# Altium PCB bgm111-breakout.PcbDoc
Units mm, origin at the board's own origin, x right, y up, seen from the top; angles counter-clockwise.
Board outline 31 x 33.75 mm, 2 copper layers (Top Layer, Bottom Layer); 16 components, 30 nets, 94 pads, 10 vias.
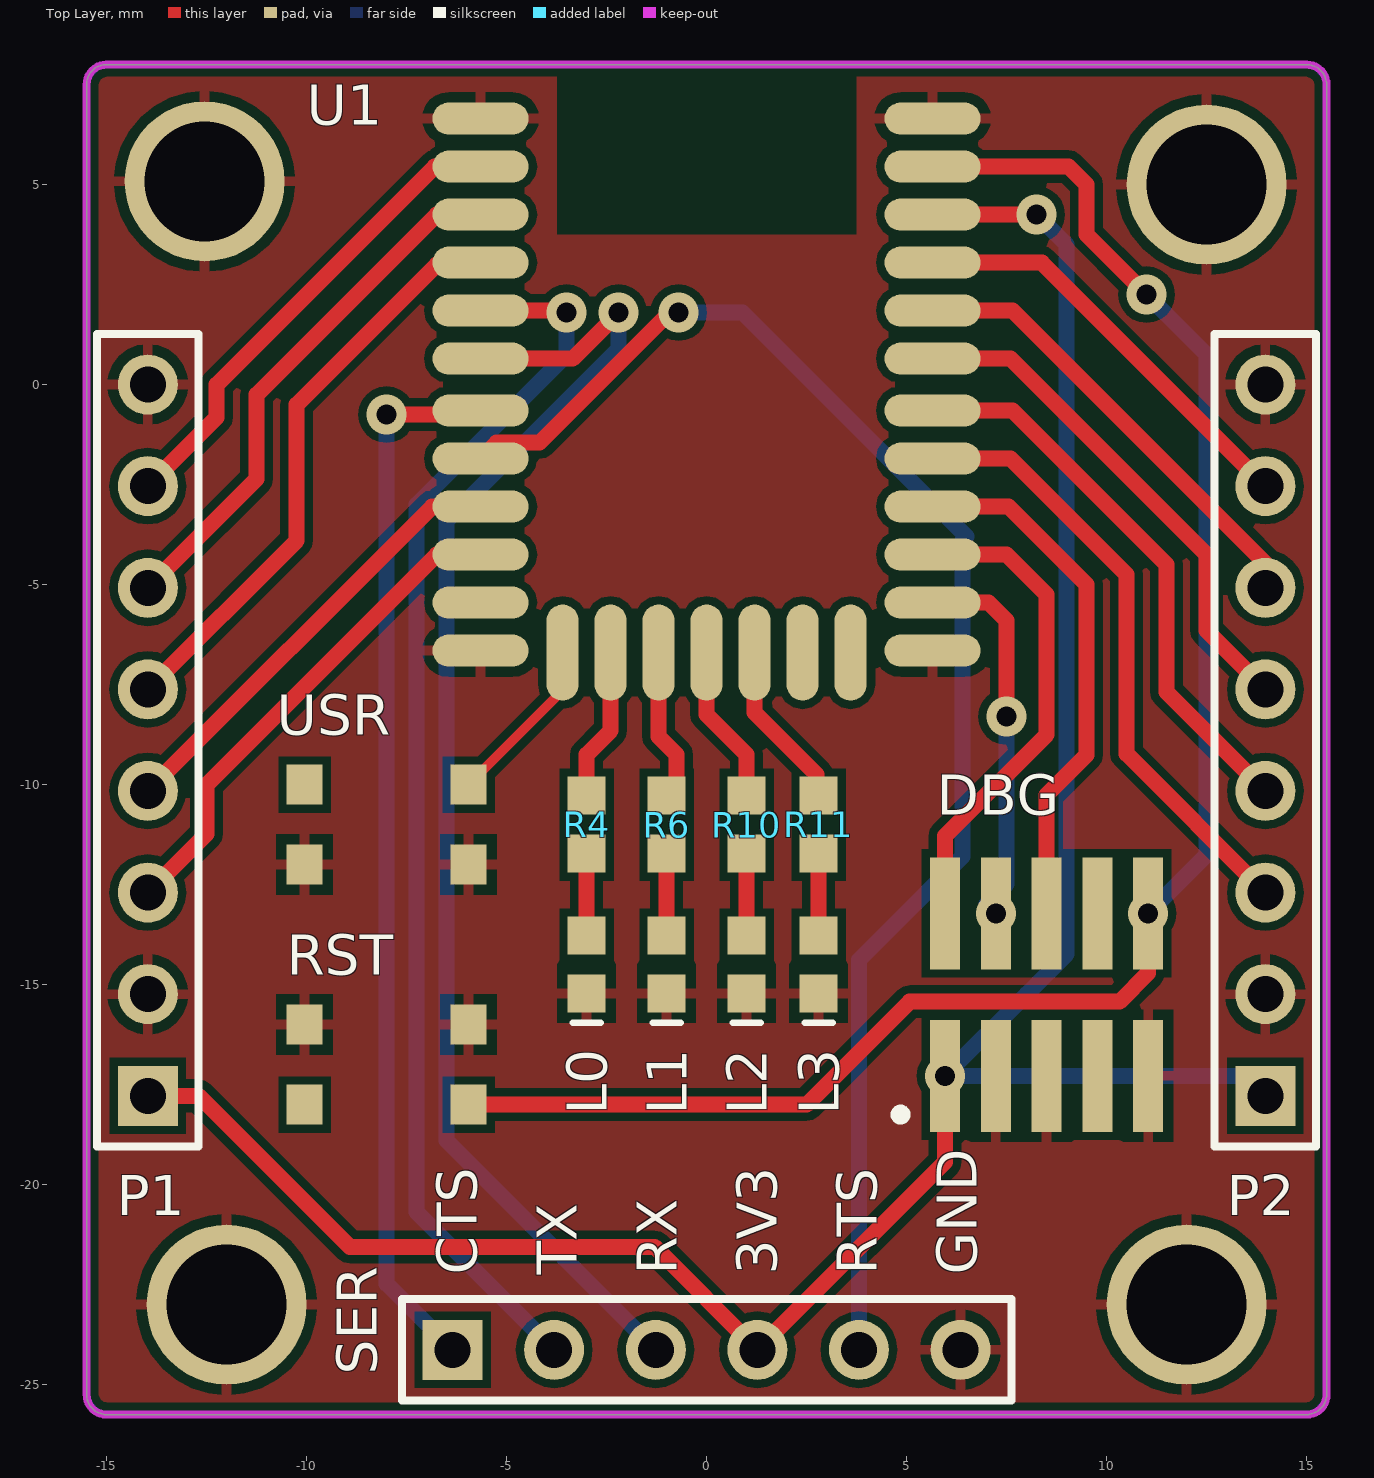
[diagram p0: Top Layer view]
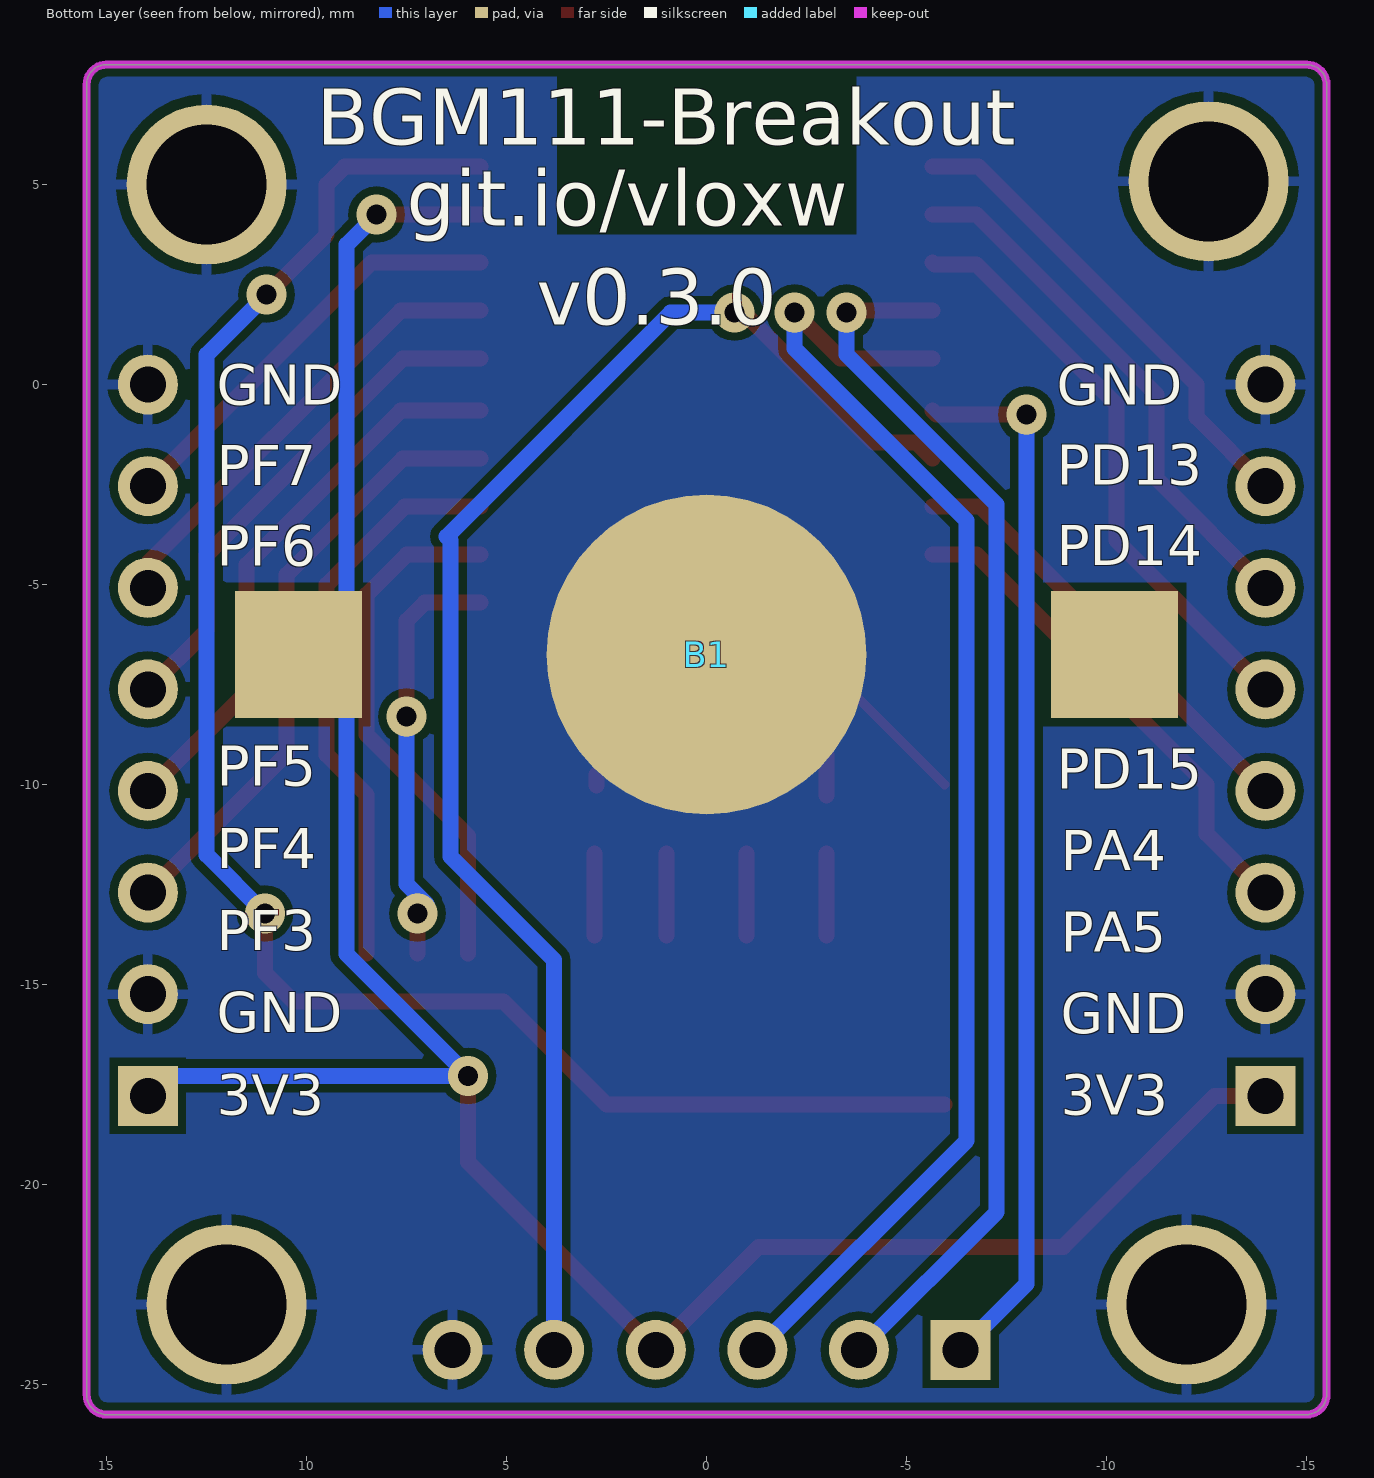
[diagram p1: Bottom Layer view, seen from below]

## Layer stack, top to bottom
Top Solder: solder mask 0.0102, Solder Resist, Dk 3.5
Top Layer: signal copper 0.0356
Dielectric 1: dielectric 0.32, FR-4, Dk 4.8
Bottom Layer: signal copper 0.0356
Bottom Solder: solder mask 0.0102, Solder Resist, Dk 3.5

## Board outline
-15,-25.75 cw(c-15,-25.25) -15.5,-25.25 -15.5,7.5 cw(c-15,7.5) -15,8 15,8 cw(c15,7.5) 15.5,7.5 15.5,-25.25 cw(c15,-25.25) 15,-25.75

## Design rules (kind name [scope] priority, off if disabled: settings)
Clearance [All] p1: gap=0.2
HoleSize [All] p1: absolutevalues=TRUE maxlimit=5 minlimit=0.025 maxpercent=80.000 minpercent=20.000
MinimumAnnularRing [All] p1: minimumring=0.203
PolygonConnect [InNet('GND') vs IsVia] p1: connectstyle=Direct reliefconductorwidth=0.254 reliefentries=4 polygonreliefangle="90 Angle" airgapwidth=0.254
PolygonConnect PolygonConnect_2 [InNet('GND') vs HasFootprint('3012')] p2: connectstyle=Direct reliefconductorwidth=0.254 reliefentries=4 polygonreliefangle="90 Angle" airgapwidth=0.254
PolygonConnect PolygonConnect_1 [All] p3: connectstyle=Relief reliefconductorwidth=0.254 reliefentries=4 polygonreliefangle="90 Angle" airgapwidth=0.254
RoutingVias [All] p1: holewidth=0.711 width=1.27 viastyle="Through Hole" minholewidth=0.5 minwidth=1 maxholewidth=0.711 maxwidth=3
SilkToSilkClearance [All] p1: silktosilkclearance=0.2
SolderMaskExpansion [All] p1: expansion=0.102
Width [All] p1: maxlimit=2 minlimit=0.2 preferedwidth=0.254
28 further rules are at their usual default settings.

## Components (designator, comment, footprint, x,y, rotation, side; value= is the part's Value field where it differs from the comment)
B1 "BATT-SINGLE-CELL" 3012 0,-6.75 r180 bottom
DBG "FTSH-105" FTSH-105-XX-X-DV-K 8.5,-15.25 r180 top
L0 "RED" SMT0603P -3,-14.5 r270 top
L1 "RED" SMT0603P -1,-14.5 r270 top
L2 "RED" SMT0603P 1,-14.5 r270 top
L3 "RED" SMT0603P 2.8,-14.5 r270 top
P1 "Header 8" HDR1X8 -13.97,-17.78 r90 top
P2 "Header 8" HDR1X8 13.97,-17.78 r90 top
R4 "Resistor" SMT0603 -3,-11 r90 top
R6 "Resistor" SMT0603 -1,-11 r90 top
R10 "Resistor" SMT0603 1,-11 r90 top
R11 "Resistor" SMT0603 2.8,-11 r90 top
RST "KMR231NG" KMR231NG -8,-17 r0 top
SER "Header 6" HDR1X6 -6.35,-24.13 r0 top
U1 "BGM111" BGM111 0,0 r0 top
USR "KMR231NG" KMR231NG -8,-11 r0 top

## Footprints (in the part's own frame and the unit in brackets; to place one, negate y for a bottom-side part, rotate by r counter-clockwise, add the part's x,y. Pads: shape width x height; smd on the part's side, far side on the other; paste and mask are expansions set on the pad)
3012 [mm] "COIN CELL HOLDER 16MM"
  round 8 smd mask+2: 0(0,0)
  rect 3.18x3.18 smd: 1(-10.2,0) 1(10.2,0)
  body extent -11.61,-8.74 11.61,6.35, height 4.05
BGM111 [mm] "BLUEGIGA BLE4.2 MODULE"
  rrect100% 2.4x0.8 smd: 1(-5.65,6.65) 2(-5.65,5.45) 3(-5.65,4.25) 4(-5.65,3.05) 5(-5.65,1.85) 6(-5.65,0.65) 7(-5.65,-0.65) 8(-5.65,-1.85) 9(-5.65,-3.05) 10(-5.65,-4.25) 11(-5.65,-5.45) 12(-5.65,-6.65) 20(5.65,-6.65) 21(5.65,-5.45) 22(5.65,-4.25) 23(5.65,-3.05) 24(5.65,-1.85) 25(5.65,-0.65) 26(5.65,0.65) 27(5.65,1.85) 28(5.65,3.05) 29(5.65,4.25) 30(5.65,5.45) 31(5.65,6.65)
  rrect100% 0.8x2.4 smd: 13(-3.6,-6.7) 14(-2.4,-6.7) 15(-1.2,-6.7) 16(0,-6.7) 17(1.2,-6.7) 18(2.4,-6.7) 19(3.6,-6.7)
  Mechanical 13 keep-out region: -3.8,4 3.8,4 3.8,7.5 -3.8,7.5
  body extent -6.45,-7.5 6.45,7.5, height 2.2
FTSH-105-XX-X-DV-K [mm] "1.27mm pitch, 10 pin, terminal strip; vertical, SMT"
  rect 0.75x2.8 smd mask+0: 1(2.54,2.03) 2(2.54,-2.03) 3(1.27,2.03) 4(1.27,-2.03) 5(0,2.03) 6(0,-2.03) 7(-1.27,2.03) 8(-1.27,-2.03) 9(-2.54,2.03) 10(-2.54,-2.03)
  silkscreen extent 3.53,2.88 3.77,3.12, body extent -3.14,-2.92 3.14,2.92, height 6.1
HDR1X6 [mm] "Connector; Header; 6 Position"
  rect 1.5x1.5 hole 0.9: 1(0,0)
  round 1.5 hole 0.9: 2(2.54,0) 3(5.08,0) 4(7.62,0) 5(10.16,0) 6(12.7,0)
  silkscreen extent -1.27,-1.27 13.97,1.27
HDR1X8 [mm] "Connector; Header; 8 Position"
  rect 1.5x1.5 hole 0.9: 1(0,0)
  round 1.5 hole 0.9: 2(2.54,0) 3(5.08,0) 4(7.62,0) 5(10.16,0) 6(12.7,0) 7(15.24,0) 8(17.78,0)
  silkscreen extent -1.27,-1.27 19.05,1.27
KMR231NG [mm] "PB SW SM TOP"
  rect 0.9x1 smd: 1(-2.05,-1) 2(2.05,-1) 3(-2.05,1) 4(2.05,1)
SMT0603 [mm]
  rect 0.95x0.95 smd: 1(-0.725,0) 2(0.725,0)
  body extent -1.02,-0.45 1.03,0.45, height 2.65
SMT0603P [mm] "Polarized 0603 footprint"
  rect 0.95x0.95 smd: 1(-0.725,0) 2(0.725,0)
  silkscreen extent 1.45,-0.35 1.45,0.35, body extent -1.01,-0.44 1.01,0.44, height 2.65

## Part data
B1: library part 3012, "BATT HOLDER COIN 16MM SMT"
DBG: library part FTSH-105-01-X-DV-K, "CONN HDR SM FTSH-105 10POS DUAL .05\""
L0 L1 L2 L3: library part LNJ237W82RA, "LED SM 0603 RED 1V95 FWD VOLTAGE"
P1 P2: "Header, 8-Pin"
R4 R6 R10 R11: library part RES-SM-0603-220R, "RES SM 0603 220R"
RST USR: "PB SW SM TOP"
SER: "Header, 6-Pin"
U1: "MODULE BLE BGM111"

## Free pads (board coordinates)
  round 4 hole 3: 0(-12.55,5.08) 0(-12,-23) 0(12,-23) 0(12.5,5)

## Via types
v1: diameter 1, hole 0.5, Top Layer to Bottom Layer, tented both sides, 10 vias

## Nets (pads, with @x,y where several pads share a name; then routed paths per layer and width w, separated by ;. In a path a pad name is that pad's centre, name@x,y a point inside that pad or via, vN(x,y) a via of type N, cw(c..) or ccw(c..) an arc to the next point about the centre after c; other vN are vias at no path point)
3V3: B1.1 DBG.1 P1.1 P2.1 SER.4 U1.29 | length 60.3
  Top Layer w0.4: P1.1 -12.7,-17.78 -8.92,-21.56 -1.3,-21.56 SER.4 5.96,-19.44 v1(5.96,-17.28) ; U1.29 v1@8,4.25
  Bottom Layer w0.4: v1(8.25,4.25) 9,3.5 9,-14.24 8,-15.24 v1(5.96,-17.28) 13.47,-17.28 P2.1
BTN0: U1.13 USR.3 USR.4 | length 4.3
  Top Layer w0.254: USR.4 -3.6,-7.65 U1.13
CTS: SER.1 U1.7 | length 26.7
  Top Layer w0.4: v1(-8,-0.75) -5.75,-0.75 U1.7 ; SER.1 SER.1@-6.107,-24.13
  Bottom Layer w0.4: v1(-8,-0.75) -8,-22.48 SER.1
GND: B1.0 DBG.3 DBG.5 DBG.9 L0.2 L1.2 L2.2 L3.2 P1.2 P1.8 P2.2 P2.8 pad.0 RST.3 RST.4 SER.6 U1.1 U1.12 U1.20 U1.31 USR.1 USR.2
GPIOA_0: P1.7 U1.2 | length 12.1
  Top Layer w0.4: P1.7 -12.25,-0.82 -12.25,0 -6.8,5.45 U1.2
GPIOA_1: P1.6 U1.3 | length 13.4
  Top Layer w0.4: P1.6 -11.25,-2.36 -11.25,-0.25 -6.75,4.25 U1.3
GPIOA_2: P1.5 U1.4 | length 14.7
  Top Layer w0.4: P1.5 -10.25,-3.9 -10.25,-0.5 -6.75,3 -5.7,3 U1.4
GPIOA_3: P1.4 U1.9 | length 11.4
  Top Layer w0.4: P1.4@-13.97,-10.02 P1.4 -6.86,-3.05 U1.9
GPIOA_4: P1.3 U1.10 | length 12.5
  Top Layer w0.4: P1.3 -12.5,-11.23 -12.5,-10 -6.75,-4.25 U1.10
GPIOA_5: U1.11
GPIOB_4: P2.7 U1.28 | length 10.6
  Top Layer w0.4: U1.28 8.38,3.05 P2.7
GPIOB_5: P2.6 U1.27 | length 11.5
  Top Layer w0.4: U1.27 7.65,1.85 13.97,-4.47 P2.6
GPIOB_6: P2.5 U1.26 | length 12.9
  Top Layer w0.4: U1.26 7.6,0.65 12.5,-4.25 12.5,-6.15 P2.5
GPIOB_7: P2.4 U1.25 | length 14.1
  Top Layer w0.4: U1.25 7.65,-0.65 11.5,-4.5 11.5,-7.69 P2.4
GPIOB_8: P2.3 U1.24 | length 15.4
  Top Layer w0.4: U1.24 7.6,-1.85 10.5,-4.75 10.5,-9.23 P2.3
LED0: R4.2 U1.14 | length 3.8
  Top Layer w0.4: R4.2 -3,-9.25 -2.4,-8.65 U1.14
LED1: R6.2 U1.15 | length 3.5
  Top Layer w0.4: U1.15 -1.2,-8.8 -0.75,-9.25 R6.2@-0.75,-10.025
LED2: R10.2 U1.16 | length 3.7
  Top Layer w0.4: U1.16 0,-8.25 1,-9.25 R10.2@1,-10.025
LED3: R11.2 U1.17 | length 4
  Top Layer w0.4: U1.17 1.2,-8.2 2.75,-9.75 R11.2@2.75,-10.025
NetL0_1: L0.1 R4.1 | length 2
  Top Layer w0.4: L0.1 R4.1
NetL1_1: L1.1 R6.1 | length 2
  Top Layer w0.4: L1.1 R6.1
NetL2_1: L2.1 R10.1 | length 2
  Top Layer w0.4: L2.1 R10.1
NetL3_1: L3.1 R11.1 | length 2
  Top Layer w0.4: L3.1 R11.1
RESETN: DBG.10 RST.1 RST.2 U1.30 | length 43.9
  Top Layer w0.4: RST.2 2.5,-18 5.074,-15.426 10.324,-15.426 11.04,-14.71 v1(11.04,-13.22) ; U1.30 9.05,5.45 9.5,5 9.5,3.75 v1(11,2.25)
  Bottom Layer w0.4: v1(11,2.25) 12.5,0.75 12.5,-11.76 v1(11.04,-13.22)
RTS: SER.5 U1.8 | length 37.4
  Top Layer w0.4: U1.8 -5.25,-1.45 -4.177,-1.45 -0.927,1.8 v1(-0.7,1.8)
  Bottom Layer w0.4: v1(-0.7,1.8) 0.9,1.8 6.5,-3.8 6.403,-3.897 6.403,-11.797 3.81,-14.39 SER.5
RX: SER.3 U1.6 | length 33.8
  Top Layer w0.4: U1.6 -3.35,0.65 v1(-2.2,1.8)
  Bottom Layer w0.4: v1(-2.2,1.8) -2.2,0.9 -6.5,-3.4 -6.5,-18.9 SER.3
SWDCLK: DBG.4 U1.21 | length 10.7
  Top Layer w0.4: U1.21 7.05,-5.45 7.5,-5.9 v1(7.5,-8.3) ; DBG.4@7.23,-14.22 v1(7.23,-13.22)
  Bottom Layer w0.4: v1(7.23,-13.22) 7,-12.99 7.5,-12.49 v1(7.5,-8.3)
SWDIO: DBG.2 U1.22 | length 13.3
  Top Layer w0.4: U1.22 7.5,-4.25 8.5,-5.25 8.5,-8.75 5.96,-11.29 DBG.2@5.96,-14.22
SWO: DBG.6 U1.23 | length 14.3
  Top Layer w0.4: U1.23 7.55,-3.05 9.5,-5 9.5,-9.258 8.5,-10.258 DBG.6@8.5,-14.22
TX: SER.2 U1.5 | length 31.1
  Top Layer w0.4: U1.5 -3.55,1.85 v1(-3.5,1.8)
  Bottom Layer w0.4: SER.2 -7.25,-20.69 -7.25,-3 -3.5,0.75 v1(-3.5,1.8)
pads on no net: DBG.7 DBG.8 U1.18 U1.19

## Polygon pours and split planes (outlines as drawn)
GND on Top Layer "GND" (solid, remove dead copper, pour order 0): -15.5,-25.75 -15.5,8 15.5,8 15.5,-25.75
GND on Bottom Layer "GND" (solid, remove dead copper, pour order 2): -15.5,-25.75 -15.5,8 15.5,8 15.5,-25.75

## Keep-outs
Keep-Out Layer:
  the board outline again, w0.2

## Other copper
Top Layer:
  pour cut-out: 3.75,3.75 -3.75,3.75 -3.75,7.75 3.75,7.75
Bottom Layer:
  pour cut-out: 3.75,3.75 -3.75,3.75 -3.75,7.75 3.75,7.75

## Silkscreen, mask and mechanical layers (free items; w line width, h text height)
Top Overlay:
  text "CTS" at -5.75,-22.25 h1 r90
  text "TX" at -3.25,-22.25 h1 r90
  text "RX" at -0.75,-22.25 h1 r90
  text "3V3" at 1.75,-22.25 h1 r90
  text "RTS" at 4.25,-22.25 h1 r90
  text "GND" at 6.75,-22.25 h1 r90
Bottom Overlay:
  text "BGM111-Breakout" at 9.75,6 h1.4
  text "git.io/vloxw" at 7.5,3.967 h1.4
  text "v0.3.0" at 4.25,1.5 h1.4
  text "GND" at -8.75,-0.5 h1
  text "GND" at 12.25,-0.5 h1
  text "PD13" at -8.75,-2.511 h1
  text "PF7" at 12.25,-2.518 h1
  text "PD14" at -8.75,-4.521 h1
  text "PF6" at 12.25,-4.536 h1
  text "PF5" at 12.25,-10.036 h1
  text "PD15" at -8.75,-10.107 h1
  text "PF4" at 12.25,-12.089 h1
  text "PA4" at -8.85,-12.143 h1
  text "PF3" at 12.25,-14.143 h1
  text "PA5" at -8.85,-14.179 h1
  text "GND" at -8.85,-16.214 h1
  text "GND" at 12.25,-16.196 h1
  text "3V3" at -8.85,-18.25 h1
  text "3V3" at 12.25,-18.25 h1